# Altium PCB ESP-audio-breakout.PcbDoc
Units mil, origin at the board's own origin, x right, y up, seen from the top; angles counter-clockwise.
Board outline 5095.03 x 2865.02 mil, 2 copper layers (Top Layer, Bottom Layer); 85 components, 80 nets, 390 pads, 684 vias.
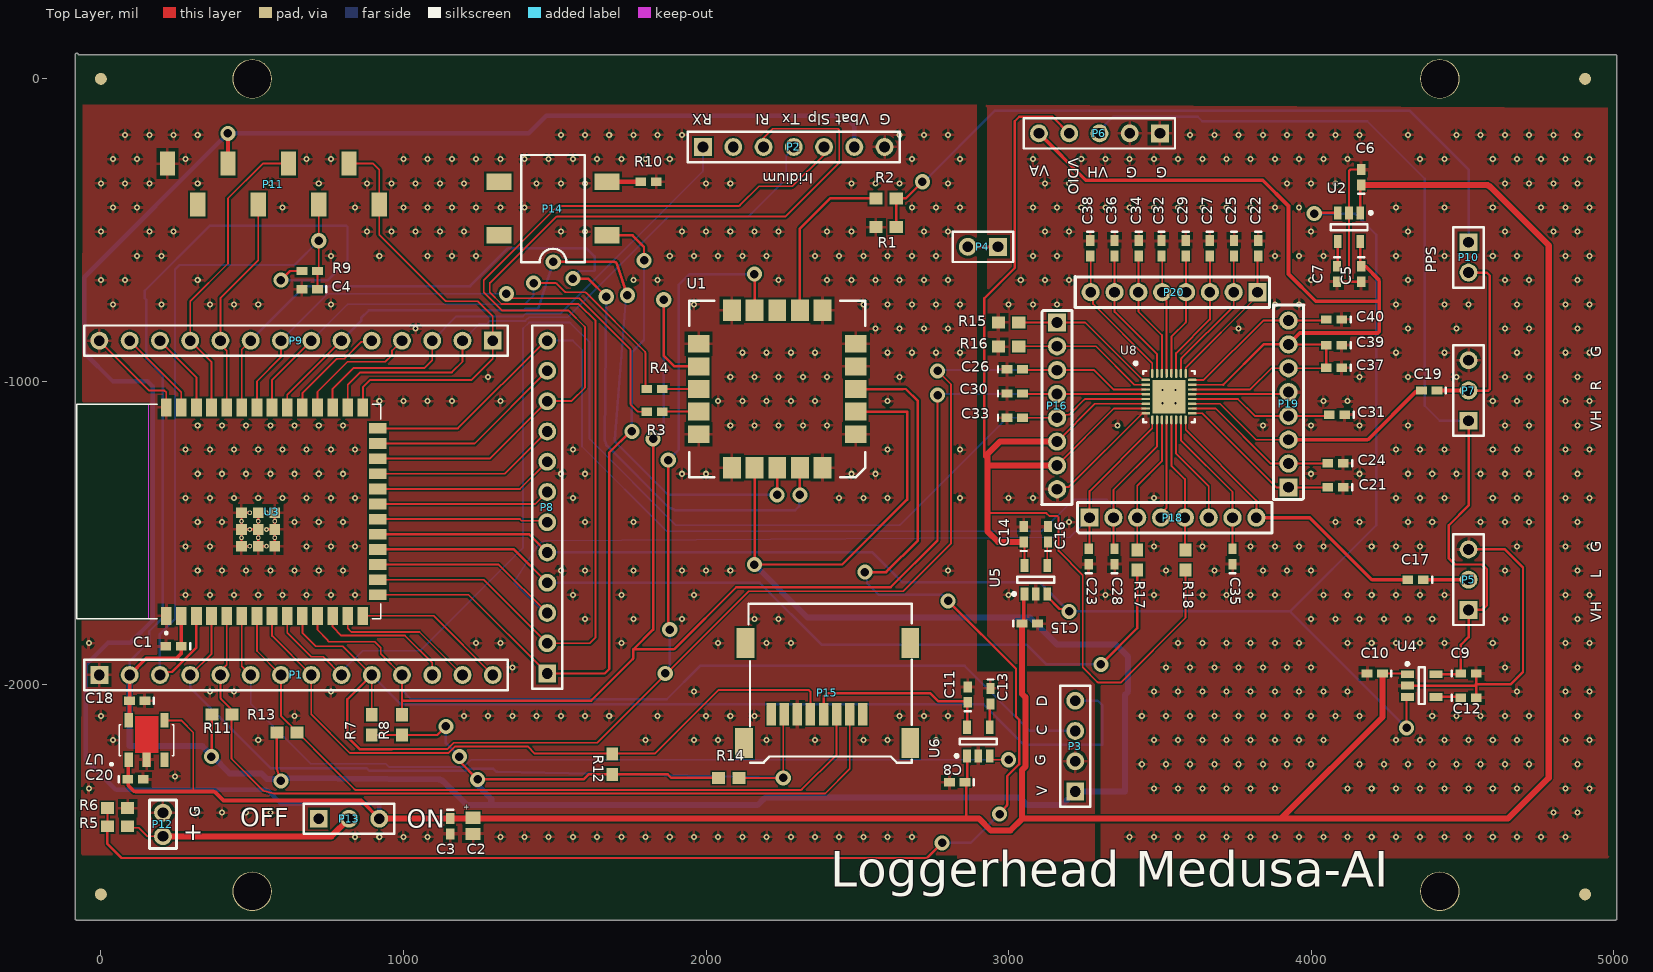
[diagram p0: Top Layer view]
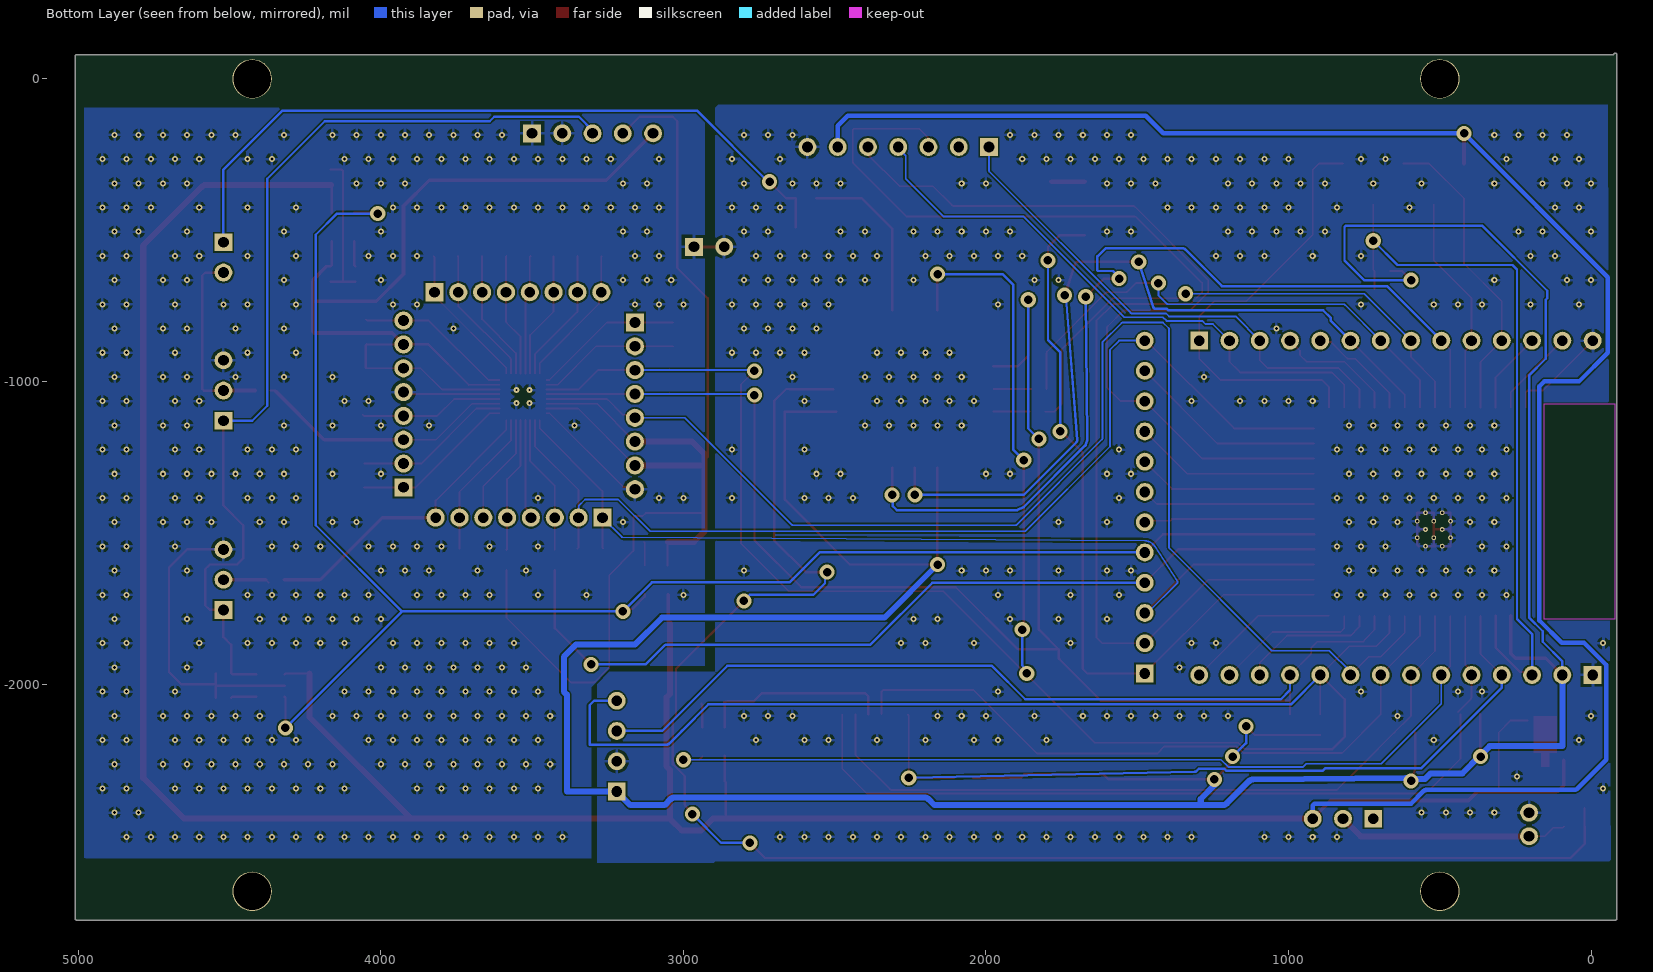
[diagram p1: Bottom Layer view, seen from below]

## Layer stack, top to bottom
Top Solder: solder mask 0.4, Solder Resist, Dk 3.5
Top Layer: signal copper 1.4
Dielectric 1: dielectric 12.6, FR-4, Dk 4.8
Bottom Layer: signal copper 1.4
Bottom Solder: solder mask 0.4, Solder Resist, Dk 3.5

## Board outline
-80,-2780.01 cw(c-80,-2775) -85.01,-2775 -85.01,80 cw(c-80,80) -76.44,83.53 -76.45,83.55 -72.92,80.02 5005,80.02 cw(c5005,75) 5010.02,75 5010.02,-2775 cw(c5005,-2775) 5005,-2780.01

## Design rules (kind name [scope] priority, off if disabled: settings)
Clearance [All] p1: gap=6 ignorepadtopadclearanceinfootprint=FALSE
PolygonConnect [All] p1: connectstyle=Relief reliefconductorwidth=10 reliefentries=4 polygonreliefangle="90 Angle" airgapwidth=10
RoutingVias [All] p1: holewidth=28 width=50 viastyle="Through Hole" minholewidth=28 minwidth=50 maxholewidth=28 maxwidth=50
SolderMaskExpansion [All] p1: expansion=4 istentingtop=FALSE
Width [All] p1: maxlimit=100 minlimit=6 preferedwidth=8
30 further rules are at their usual default settings.

## Classes and differential pairs
component class medusa-ai-audio: C5 C6 C7 C9 C10 C12 C14 C15 C16 C17 C19 C21 C22 C23 C24 C25 C26 C27 C28 C29 C30 C31 C32 C33 C34 C35 C36 C37 C38 C39 C40 P4 P5 P6 P7 P10 P16 P18 P19 P20 R15 R16 R17 R18 U2 U4 U5 U8
component class ESP-audio-breakout: C1 C2 C3 C4 C8 C11 C13 C18 C20 P1 P2 P3 P8 P9 P11 P12 P13 P14 P15 R1 R2 R3 R4 R5 R6 R7 R8 R9 R10 R11 R12 R13 R14 U1 U3 U6 U7

## Components (designator, comment, footprint, x,y, rotation, side; value= is the part's Value field where it differs from the comment)
C1 "0.1uF" 0402 240,-1875 r180 top
C2 "10uF" Tant0805 1230,-2468.5 r90 top
C3 "0.1uF" 0402 1155,-2470 r270 top
C4 "1uF" 0402 690,-695 r180 top value=0.1uF
C5 "2.2uF" 0402 4165,-645 r270 top value=0.1uF
C6 "1uF" 0402 4165,-325 r90 top value=0.1uF
C7 "10nF" 0402 4085,-645 r270 top value=0.1uF
C8 "1.0uF" 0402 2830,-2325 r180 top value=0.1uF
C9 "2.2uF" 0402 4520,-1965 r0 top value=0.1uF
C10 "1uF" 0402 4210,-1965 r180 top value=0.1uF
C11 "2.2uF" 0402 2865,-2035 r90 top value=0.1uF
C12 "10nF" 0402 4520,-2045 r0 top value=0.1uF
C13 "10nF" 0402 2940,-2040 r270 top value=0.1uF
C14 "2.2uF" 0402 3050,-1505 r90 top value=0.1uF
C15 "1uF" 0402 3070,-1800 r0 top value=0.1uF
C16 "10nF" 0402 3130,-1505 r90 top value=0.1uF
C17 "1.0uF" 0402 4345,-1655 r180 top value=0.1uF
C18 "4.7uF" 0402 120,-2055 r180 top value=0.1uF
C19 "1.0uF" 0402 4390,-1030 r180 top value=0.1uF
C20 "4.7uF" 0402 114.41,-2315 r0 top value=0.1uF
C21 "1.0uF" 0402 4080.59,-1350 r180 top value=0.1uF
C22 "1.0uF" 0402 3825,-560 r270 top value=0.1uF
C23 "22pF" 0402 3265,-1578.19 r90 top value=0.1uF
C24 "1.0uF" 0402 4080,-1270 r180 top value=0.1uF
C25 "1.0uF" 0402 3745,-560 r270 top value=0.1uF
C26 "22pF" 0402 3020,-960 r0 top value=0.1uF
C27 "1.0uF" 0402 3665,-560 r270 top value=0.1uF
C28 "22pF" 0402 3350,-1578.19 r90 top value=0.1uF
C29 "1.0uF" 0402 3585,-560 r270 top value=0.1uF
C30 "22pF0.1uF" 0402 3020,-1040 r0 top value=0.1uF
C31 "1.0uF" 0402 4085.59,-1110 r180 top value=0.1uF
C32 "1.0uF" 0402 3505,-560 r270 top value=0.1uF
C33 "22pF" 0402 3020,-1120 r0 top value=0.1uF
C34 "1.0uF" 0402 3430,-560 r270 top value=0.1uF
C35 "1.0uF" 0402 3740,-1578.19 r90 top value=0.1uF
C36 "1.0uF" 0402 3350,-560 r270 top value=0.1uF
C37 "1.0uF" 0402 4075,-955 r180 top value=0.1uF
C38 "1.0uF" 0402 3270,-560 r270 top value=0.1uF
C39 "1.0uF" 0402 4075,-880 r180 top value=0.1uF
C40 "1.0uF" 0402 4075,-795 r180 top value=0.1uF
P1 "Header 14" HDR1X14 -5,-1970 r0 top
P2 "Iridium" HDR1X7 1990,-225 r0 top
P3 "Display" HDR1X4 3220,-2355 r90 top
P4 "GND Tie" HDR1X2 2965,-555 r180 top
P5 "HYDROPHONE L" HDR1X3 4520,-1755 r90 top
P6 "Header 5" HDR1X5 3500,-180 r180 top
P7 "HYDROPHONE R" HDR1X3 4520,-1130 r90 top
P8 "Header 12" HDR1X12 1475,-1965 r90 top
P9 "Header 14" HDR1X14 1295,-865 r180 top
P10 "Jumper PPS to Audio R" HDR1X2 4520,-540 r270 top
P11 "10129380-908001BLF" Header_8_SMT 220,-280 r0 top
P12 "BAT" HDR_2x1_2mm 205,-2503.74 r0 top
P13 "switch" HDR1X3 720,-2445 r0 top
P14 "factory reset" SOP4 1673.27,-517.17 r180 top
P15 "microSD-Molex" microSD_Molex_hinged 2145.2,-2194.49 r90 top
P16 "HDR_8x1_2mm" HDR_8x1_2mm 3160,-805 r180 top
P18 "HDR_8x1_2mm" HDR_8x1_2mm 3267.48,-1450 r270 top
P19 "HDR_8x1_2mm" HDR_8x1_2mm 3925,-1350 r0 top
P20 "HDR_8x1_2mm" HDR_8x1_2mm 3822.52,-705 r90 top
R1 "10k" 3-0603 2595,-490 r0 top
R2 "10k" 3-0603 2595,-395 r180 top
R3 "100Ohm" 2-0402 1830,-1100 r0 top
R4 "100Ohm" 2-0402 1830,-1025 r0 top
R5 "100k" 3-0603 55,-2470 r0 top
R6 "100k" 3-0603 55,-2410 r180 top
R7 "4.7k" 3-0603 895,-2135 r270 top
R8 "4.7k" 3-0603 995,-2135 r270 top
R9 "10k" 2-0402 690,-635 r0 top
R10 "10k" 2-0402 1810,-340 r0 top
R11 "10K" 3-0603 400,-2100 r0 top
R12 "10K" 3-0603 1690,-2265 r90 top
R13 "10K" 3-0603 615,-2160 r0 top
R14 "10K" 3-0603 2075,-2310 r0 top
R15 "10k" 3-0603 3000,-805 r180 top
R16 "10k" 3-0603 3000,-885 r180 top
R17 "51" 3-0603 3425,-1590 r270 top
R18 "10K-DNP" 3-0603 3585,-1590 r270 top
U1 "SAM-M8Q" "GPS SAM-MQ8" 2495.04,-1174.45 r180 top
U2 "ADP1712" MF05A_N 4125,-490 r270 top
U3 "ESP32-S3-WROOM-1-N16R8" XCVR_ESP32-S3-WROOM-1-N16R2 422.87,-1430 r90 top
U4 "ADP1712" MF05A_N 4365,-2005 r0 top
U5 "ADP1712" MF05A_N 3090,-1655 r90 top
U6 "ADP1712" MF05A_N 2900,-2190 r90 top
U7 "3.3V LDO" AP7361C-33Y5-13 91.89,-2250 r90 top
U8 "ES7210" ES7210 3530,-1050 r0 top

## Footprints (in the part's own frame and the unit in brackets; to place one, negate y for a bottom-side part, rotate by r counter-clockwise, add the part's x,y. Pads: shape width x height; smd on the part's side, far side on the other; paste and mask are expansions set on the pad)
2-0402 [mm] "Chip Resistor; Body 1 x 0.5 mm (LxW typ)"
  rect 0.9x0.7 smd: 1(-0.65,0) 2(0.65,0)
3-0603 [mm] "Chip Resistor; Body 1.6 x 0.9 mm (LxW typ)"
  rect 1.1x1 smd: 1(-0.85,0) 2(0.85,0)
0402 [mm] "Chip Capacitor; Body 1.0 x 0.5 mm (LxW typ)"
  rect 0.9x0.7 smd: 1(-0.65,0) 2(0.65,0)
  silkscreen extent -1.4,-0.25 -1.4,0.25
AP7361C-33Y5-13 [mm] "3.3V LDO"
  rect 1.2x0.68 smd: 1(0,0) 3(0,-3) 4(3.3,-3) 5(3.3,0)
  rect 1.2x0.68 smd paste-2 mask+0: 2(0,-1.5)
  Top Layer region: 3.65,-2.465 0.6,-2.465 0.6,-1.84 -0.6,-1.84 -0.6,-1.16 0.6,-1.16 0.6,-0.535 3.65,-0.535
  silkscreen extent -0.48,-3.8 2.95,1.54
ES7210 [mm] "4-ch audio codec"
  oval 0.75x0.2 smd mask+0.05: 1(-1.95,1.4) 2(-1.95,1) 3(-1.95,0.6) 4(-1.95,0.2) 5(-1.95,-0.2) 6(-1.95,-0.6) 7(-1.95,-1) 8(-1.95,-1.4) 17(1.95,-1.4) 18(1.95,-1) 19(1.95,-0.6) 20(1.95,-0.2) 21(1.95,0.2) 22(1.95,0.6) 23(1.95,1) 24(1.95,1.4)
  oval 0.2x0.75 smd mask+0.05: 9(-1.4,-1.95) 10(-1,-1.95) 11(-0.6,-1.95) 12(-0.2,-1.95) 13(0.2,-1.95) 14(0.6,-1.95) 15(1,-1.95) 16(1.4,-1.95) 25(1.4,1.95) 26(1,1.95) 27(0.6,1.95) 28(0.2,1.95) 29(-0.2,1.95) 30(-0.6,1.95) 31(-1,1.95) 32(-1.4,1.95)
  rect 2.8x2.8 smd: 33(0,0)
  silkscreen extent -2.92,-2.15 2.15,2.92, body extent -2,-2 2,2, height 0.75
"GPS SAM-MQ8" [mm]
  rect 1.8x1.5 smd paste-0.25: 1(0,0) 2(0,-1.9) 3(0,-3.8) 4(0,-5.7) 5(0,-7.6) 11(13.2,-7.6) 12(13.2,-5.7) 13(13.2,-3.8) 14(13.2,-1.9) 15(13.2,0)
  rect 1.5x1.8 smd paste-0.25: 6(2.8,-10.4) 7(4.7,-10.4) 8(6.6,-10.4) 9(8.5,-10.4) 10(10.4,-10.4) 16(10.4,2.8) 17(8.5,2.8) 18(6.6,2.8) 19(4.7,2.8) 20(2.8,2.8)
  silkscreen extent -0.8,-11.2 14,3.6
HDR1X2 [mm] "Connector; Header; 2 Position"
  rect 1.5x1.5 hole 0.9: 1(0,0)
  round 1.5 hole 0.9: 2(2.54,0)
  silkscreen extent -1.27,-1.27 3.81,1.27
HDR1X3 [mm] "Connector; Header; 3 Position"
  rect 1.5x1.5 hole 0.9: 1(0,0)
  round 1.5 hole 0.9: 2(2.54,0) 3(5.08,0)
  silkscreen extent -1.27,-1.27 6.35,1.27
HDR1X4 [mm] "Connector; Header; 4 Position"
  rect 1.5x1.5 hole 0.9: 1(0,0)
  round 1.5 hole 0.9: 2(2.54,0) 3(5.08,0) 4(7.62,0)
  silkscreen extent -1.27,-1.27 8.89,1.27
HDR1X5 [mm] "Connector; Header; 5 Position"
  rect 1.5x1.5 hole 0.9: 1(0,0)
  round 1.5 hole 0.9: 2(2.54,0) 3(5.08,0) 4(7.62,0) 5(10.16,0)
  silkscreen extent -1.27,-1.27 11.43,1.27
HDR1X7 [mm] "Connector; Header; 7 Position"
  rect 1.5x1.5 hole 0.9: 1(0,0)
  round 1.5 hole 0.9: 2(2.54,0) 3(5.08,0) 4(7.62,0) 5(10.16,0) 6(12.7,0) 7(15.24,0)
  silkscreen extent -1.27,-1.27 16.51,1.27
HDR1X12 [mm] "Connector; Header; 12 Position"
  rect 1.5x1.5 hole 0.9: 1(0,0)
  round 1.5 hole 0.9: 2(2.54,0) 3(5.08,0) 4(7.62,0) 5(10.16,0) 6(12.7,0) 7(15.24,0) 8(17.78,0) 9(20.32,0) 10(22.86,0) 11(25.4,0) 12(27.94,0)
  silkscreen extent -1.27,-1.27 29.21,1.27
HDR1X14 [mm] "Connector; Header; 14 Position"
  rect 1.5x1.5 hole 0.9: 1(0,0)
  round 1.5 hole 0.9: 2(2.54,0) 3(5.08,0) 4(7.62,0) 5(10.16,0) 6(12.7,0) 7(15.24,0) 8(17.78,0) 9(20.32,0) 10(22.86,0) 11(25.4,0) 12(27.94,0) 13(30.48,0) 14(33.02,0)
  silkscreen extent -1.27,-1.27 34.29,1.27
HDR_2x1_2mm [mm]
  round 1.5 hole 0.9: 1(0,0.016) 2(0,2)
  silkscreen extent -1.14,-1.02 1.14,3.05
HDR_8x1_2mm [mil]
  rect 60x60 hole 35.43: 1(0,0.04)
  round 60 hole 35.43: 2(0,78.78) 3(0,157.52) 4(0,236.26) 5(0,315) 6(0,393.7) 7(0,472.44) 8(0,551.18)
  silkscreen extent -50,-40 51,602
Header_8_SMT [mil] "Amphenol  10129380-908001BLF"
  rect 50x80 smd: 1(0,0) 2(100,-135) 3(200,0) 4(300,-135) 5(400,0) 6(500,-135) 7(600,0) 8(700,-135)
MF05A_N [mm] "SOT23, 5-Leads, Body 2.9x1.6mm, Pitch 0.95mm, Lead Span 2.8mm, IPC Medium Density"
  rect 1.1x0.65 smd: 1(-1.2,0.95) 2(-1.2,0) 3(-1.2,-0.95) 4(1.2,-0.95) 5(1.2,0.95)
  silkscreen extent -1.32,-1.55 0.25,1.95, body extent -0.9,-1.55 0.9,1.55, height 1.19
microSD_Molex_hinged [mm]
  rect 2.5x1.5 smd: 0(0,0.508) 0(8.382,0.381)
  rect 2.5x1.45 smd: 0(0,-13.45) 0(8.382,-13.462)
  rect 1.9x0.8 smd: 1(2.4,-9.475) 2(2.4,-8.375) 3(2.4,-7.275) 4(2.4,-6.175) 5(2.4,-5.075) 6(2.4,-3.975) 7(2.4,-2.875) 8(2.4,-1.775)
  silkscreen extent -1.65,-13.59 11.68,0.13
SOP4 [mm]
  rect 2.1x1.4 smd: 1(0,0) 2(0,-4.5) 3(9.1,-4.5) 4(9.1,0)
  silkscreen extent 1.89,-6.75 7.21,2.25
Tant0805 [mil]
  rect 40x50 smd: 1(-26.5,0) 2(26.5,0)
XCVR_ESP32-S3-WROOM-1-N16R2 [mm]
  rect 1.5x0.9 smd: 1(-8.75,5.26) 2(-8.75,3.99) 3(-8.75,2.72) 4(-8.75,1.45) 5(-8.75,0.18) 6(-8.75,-1.09) 7(-8.75,-2.36) 8(-8.75,-3.63) 9(-8.75,-4.9) 10(-8.75,-6.17) 11(-8.75,-7.44) 12(-8.75,-8.71) 13(-8.75,-9.98) 14(-8.75,-11.25) 27(8.75,-11.25) 28(8.75,-9.98) 29(8.75,-8.71) 30(8.75,-7.44) 31(8.75,-6.17) 32(8.75,-4.9) 33(8.75,-3.63) 34(8.75,-2.36) 35(8.75,-1.09) 36(8.75,0.18) 37(8.75,1.45) 38(8.75,2.72) 39(8.75,3.99) 40(8.75,5.26)
  rect 0.9x1.5 smd: 15(-6.985,-12.5) 16(-5.715,-12.5) 17(-4.445,-12.5) 18(-3.175,-12.5) 19(-1.905,-12.5) 20(-0.635,-12.5) 21(0.635,-12.5) 22(1.905,-12.5) 23(3.175,-12.5) 24(4.445,-12.5) 25(5.715,-12.5) 26(6.985,-12.5)
  rect 0.9x0.9 smd: 41_1(-1.5,-2.46) 41_2(-2.9,-2.46) 41_3(-0.1,-2.46) 41_4(-2.9,-3.86) 41_5(-1.5,-3.86) 41_6(-0.1,-3.86) 41_7(-2.9,-1.06) 41_8(-1.5,-1.06) 41_9(-0.1,-1.06)
  round 0.4 hole 0.2 mask+0: 41_10(-1.5,-1.76) 41_11(-2.9,-1.76) 41_12(-0.1,-1.76) 41_13(-2.9,-3.16) 41_14(-1.5,-3.16) 41_15(-0.1,-3.16) 41_16(-2.2,-1.06) 41_17(-0.8,-1.06) 41_18(-2.2,-2.46) 41_19(-0.8,-2.46) 41_20(-2.2,-3.86) 41_21(-0.8,-3.86)
  Keep-Out Layer region: 9,6.75 -9,6.75 -9,12.75 9,12.75
  Keep-Out Layer region: 9,6.75 -9,6.75 -9,12.75 9,12.75
  silkscreen extent -10.3,-12.75 9,12.75

## Part data
C1 C3 C4 C5 C6 C7 C8 C9 C10 C11 C12 C13 C14 C15 C16 C17 C18 C19 C20 C21 C22 C23 C24 C25 C26 C27 C28 C29 C30 C31 C32 C33 C34 C35 C36 C37 C38 C39 C40: library part C0402, "Ceramic Chip Capacitor - Standard", PackageDocument=Mar-2001, Code_IPC="1005 [0402]", Code_JEITA=0402, ComponentLink1Description="Manufacturer Link", ComponentLink1URL=http://www.kemet.com/, ComponentLink2Description=Datasheet, ComponentLink2URL=http://www.kemet.com/kemet/web/homepage/kechome.nsf/vapubfilesname/F3102TA.pdf/$file/F3102TA.pdf, DatasheetDocument=Mar-2001, LatestRevisionDate=19-Mar-2004, LatestRevisionNote="Silkscreen size reduced.", Note="Footprint corresponds to dimensions for bulk cassette packaging. This case size has tightened tolerances.", PackageReference=0402, Published=17-Jul-2002, Publisher="Altium Limited"
C2: library part Tant0805
P1 P9: "Header, 14-Pin", LatestRevisionDate=17-Jul-2002, LatestRevisionNote="Re-released for DXP Platform.", Publisher="Altium Limited"
P2: library part "Header 7", "Header, 7-Pin", LatestRevisionDate=17-Jul-2002, LatestRevisionNote="Re-released for DXP Platform.", Publisher="Altium Limited"
P3: library part "Header 4", "Header, 4-Pin", LatestRevisionDate=17-Jul-2002, LatestRevisionNote="Re-released for DXP Platform.", Publisher="Altium Limited"
P4 P10: library part "Header 2", "Header, 2-Pin", LatestRevisionDate=17-Jul-2002, LatestRevisionNote="Re-released for DXP Platform.", Publisher="Altium Limited"
P5 P7 P13: library part "Header 3", "Header, 3-Pin", LatestRevisionDate=17-Jul-2002, LatestRevisionNote="Re-released for DXP Platform.", Publisher="Altium Limited"
P6: "Header, 5-Pin", LatestRevisionDate=17-Jul-2002, LatestRevisionNote="Re-released for DXP Platform.", Publisher="Altium Limited"
P8: "Header, 12-Pin", LatestRevisionDate=17-Jul-2002, LatestRevisionNote="Re-released for DXP Platform.", Publisher="Altium Limited"
P11: library part Header8_SMT, "Surface mount header", Supplier Part Number 1=649-1012938090801BLF, Supplier 1=Mouser
P12: library part HDR_2x1_2mm
P14: library part pushbutton, Supplier Part Number 1=450-1757-2-ND, Supplier 1=Digi-Key
P15: library part microSD_Molex_hinged, Supplier Part Number 1=WM19081DKR-ND, Supplier 1=Digi-Key
R1 R2 R5 R6 R7 R8 R15 R16 R17 R18: library part ERJ3RK, "Precision Thick Film Chip Resistor, 10 Ohm to 1M Ohm Range, 1% and 0.5% Tolerance, 0603 Size, 0.063 W", PackageDocument=Mar-2003, Code_IPC="1608 [0603]", ComponentLink1Description="Manufacturer Link", ComponentLink1URL=http://www.panasonic.com/industrial/components/resistive_products.htm, ComponentLink2Description=Datasheet, ComponentLink2URL=http://www.panasonic.com/industrial/components/pdf/AOA0000CE2.pdf, LatestRevisionDate=19-Mar-2004, LatestRevisionNote="Silkscreen size reduced.", PackageReference=3-0603, Published=17-Dec-2003, Publisher="Altium Limited"
R3 R4 R9 R10: library part ERJ2RB, "Precision Thick Film Chip Resistor, 10 Ohm to 1M Ohm Range, 1% and 0.5% Tolerance, 0402 Size, 0.063 W", PackageDocument=Mar-2003, Code_IPC="1005 [0402]", ComponentLink1Description="Manufacturer Link", ComponentLink1URL=http://www.panasonic.com/industrial/components/resistive_products.htm, ComponentLink2Description=Datasheet, ComponentLink2URL=http://www.panasonic.com/industrial/components/pdf/AOA0000CE2.pdf, LatestRevisionDate=19-Mar-2004, LatestRevisionNote="Silkscreen size reduced.", PackageReference=2-0402, Published=17-Dec-2003, Publisher="Altium Limited"
R11 R12 R13 R14: library part ERJ3EK, "Precision Thick Film Chip Resistor, 10 Ohm to 1M Ohm Range, 1% and 0.5% Tolerance, 0603 Size, 0.063 W", PackageDocument=Mar-2003, Code_IPC="1608 [0603]", ComponentLink1Description="Manufacturer Link", ComponentLink1URL=http://www.panasonic.com/industrial/components/resistive_products.htm, ComponentLink2Description=Datasheet, ComponentLink2URL=http://www.panasonic.com/industrial/components/pdf/AOA0000CE2.pdf, LatestRevisionDate=19-Mar-2004, LatestRevisionNote="Silkscreen size reduced.", PackageReference=3-0603, Published=17-Dec-2003, Publisher="Altium Limited"
U1: library part "GPS SAM-M8Q"
U2 U4 U5 U6: library part LP3985IM5-3.3, "Micropower, 150mA Low-Noise Ultra Low-Dropout CMOS Voltage Regulator", DigiKeyPartNumber=LP3985IM5-3.3CT-ND, Manufacturer="National Semiconductor", PackageTopMarking=LDQB*XTT, PowerWise=N, ComponentLink1Description="LP3985 Datasheet", ComponentLink1URL=http://www.national.com/ds/LP/LP3985.pdf, ComponentLink2Description="LP3985 Web Page", ComponentLink2URL=http://www.national.com/pf/LP/LP3985.html, ComponentLink3Description="MF05A Package Page", ComponentLink3URL=http://www.national.com/packaging/folders/mf05a.html, CompType="LDO IC", DatasheetVersion=Aug-2005, PackageDescription="Molded SOT-23, .115 x .063 x .040 in Body, 5 Lead, .0375 in Pitch", PackageReference=MF05A, PackageVersion="revD, Aug-2008", PartNumber=LP3985IM5-3.3, PinCount=5, Published=4-Dec-2008, Publisher="Altium Limited", RoHS=O
U3: library part ESP32-S3-WROOM-1-N16R2, "Bluetooth, WiFi 802.11b/g/n, Bluetooth v5.0 Transceiver Module 2.4GHz PCB Trace Surface Mount", Package=None, Availability="In Stock", Check_prices=https://www.snapeda.com/parts/ESP32-S3-WROOM-1-N16R2/Espressif+Systems/view-part/?ref=eda, MF="Espressif Systems", MP=ESP32-S3-WROOM-1-N16R2, Price=None, Purchase-URL=https://pricing.snapeda.com/search/part/ESP32-S3-WROOM-1-N16R2/?ref=eda, SnapEDA_Link=https://www.snapeda.com/parts/ESP32-S3-WROOM-1-N16R2/Espressif+Systems/view-part/?ref=snap
U7: library part AP7361C-33Y5-13
U8: "Audio CODEC"

## Free pads (board coordinates)
  round 130 hole 125: 0(500,-2685) 0(500,0) 0(4425,-2685) 0(4425,0)
  round 39.37 smd: 10(0,-2695) 10(0,0) 10(4905,-2695) 10(4905,0)

## Via types
v1: diameter 20, hole 10, Top Layer to Bottom Layer, tented both sides, 642 vias
v2: diameter 50, hole 28, Top Layer to Bottom Layer, 38 vias
v3: diameter 19.68, hole 7.87, Top Layer to Bottom Layer, 4 vias

## Nets (pads, with @x,y where several pads share a name; then routed paths per layer and width w, separated by ;. In a path a pad name is that pad's centre, name@x,y a point inside that pad or via, vN(x,y) a via of type N, cw(c..) or ccw(c..) an arc to the next point about the centre after c; other vN are vias at no path point)
3V3: C1.1 C18.2 P1.2 P3.1 R7.2 R8.2 R9.1 R11.1 R12.1 R13.1 R14.1 U1.2 U1.17 U3.2 U7.5 | length 11544.4
  Top Layer w6: U7.5 U7.5@94.41,-2117.56 ; C18.2 C18.2@95,-2054.41 ; C1.1@265,-1875.59 C1.1 C1.1@265.79,-1874.8
  Top Layer w8: R11.1 366.54,-2238.46 v2(365,-2240) v2@370,-2240 ; R13.1 581.54,-2279.3 ccw(c589.54,-2279.3) 581.97,-2281.89 v2(595,-2320) ; v2(595,-665) 625,-635 R9.1 ; R7.2 R8.2 1111.54,-2168.46 v2(1140,-2140) ; v2(1185,-2240) 1185,-2255 v2(1245,-2315) 1595,-2315 1611.54,-2298.46 R12.1 1873.46,-2298.46 1885,-2310 R14.1 ; U1.17 2160.39,-1604.61 v2(2160,-1605) 2450,-1605 2664.65,-1390.35 2664.65,-1099.65 U1.2
  Top Layer w12: U7.5@94.41,-2117.56 C18.2 ; C18.2@95,-2054.41 P1.2 150,-1915 250,-1915 265,-1900 C1.1@265,-1875.59 ; C1.1@265.79,-1874.8 U3.2
  Bottom Layer w8: P1.2 95,-1925 160,-1860 160,-1825.3 205,-1780.3 205,-980 150,-925 150,-730 145,-725 145,-700 360,-485 810.31,-485 815,-489.69 815,-600 750,-665 v2(595,-665) ; v2(1140,-2140) 1140,-2195 v2(1185,-2240)
  Bottom Layer w20: P1.2 95,-2205 335,-2205 367.5,-2237.5 425,-2295 530,-2295 549.26,-2314.26 589.26,-2314.26 v2(595,-2320) 598.57,-2316.49 cw(c612.58,-2330.77) 612.77,-2310.77 1117.34,-2315.44 cw(c1117.15,-2335.44) 1131.27,-2321.28 ; 1131.3,-2321.3 1204.14,-2394.14 ccw(c1218.28,-2380) 1218.28,-2400 1290,-2400 ; v2(1245,-2315) 1243.28,-2316.72 1243.28,-2333.28 1290,-2380 1290,-2400 ; v2(2160,-1605) 2335,-1780 3070,-1780 3160,-1870 3355,-1870 3395,-1910 3395,-2025 3385,-2035 3385,-2355 P3.1 3175,-2400 3062.01,-2400 3042.87,-2380.86 ccw(c3028.72,-2395) 3028.72,-2375 2203.29,-2375 ccw(c2203.29,-2395) 2189.15,-2380.86 2170,-2400 1290,-2400
4V2: P12.1 P13.2 R5.2 | length 769.3
  Top Layer w6: R5.2 93.46,-2475 125,-2475 153.11,-2503.11 P12.1
  Top Layer w20: P12.1 761.89,-2503.11 P13.2
BCLK: C23.2 P8.3 P18.1 U3.17 U8.9 | length 3289.7
  Top Layer w6: U3.17 1315,-1605 P8.3 ; C23.2 3267.52,-1550.08 P18.1 3267.52,-1362.48 3474.88,-1155.12 U8.9
  Bottom Layer w6: P8.3 1468.63,-1765 cw(c1468.67,-1759) 1464.45,-1763.27 1368.25,-1667.07 cw(c1372.52,-1662.86) 1367.49,-1659.59 1442.71,-1543.99 cw(c1475,-1565) 1474.74,-1526.47 3200.07,-1515 ccw(c3200.03,-1509) 3204.28,-1513.24 P18.1
BUTTON: P8.1 P14.1 U3.15 | length 2456.9
  Top Layer w6: U3.15 1215,-1705 P8.1
  Top Layer w8: P8.1 1665,-1965 1680,-1950 1680,-1235 v2@1750,-1165 ; P14.1 1757.17,-517.17 1795,-555 v2(1795,-600)
  Bottom Layer w8: v2(1755,-1165) 1755,-902.5 1795,-862.5 v2(1795,-600)
CHIP_PU: C4.1 P1.3 P11.6 R9.2 U3.3 | length 2420
  Top Layer w6: C4.1 R9.2 720,-630.59 v2(720,-535) P11.6
  Top Layer w8: P1.3 204.77,-1960.23 234.77,-1960.23 315.79,-1879.21 U3.3
  Bottom Layer w8: P1.3 195,-1835 245,-1785 245,-630 260,-615 640,-615 v2(720,-535)
CHRGA: P8.11 U3.25 | length 659.4
  Top Layer w6: U3.25 1235,-1205 P8.11
CS: P1.5 P15.2 R11.2 U3.5 | length 2794.4
  Top Layer w6: U3.5 415.79,-1936.3 395,-1957.09 P1.5 395,-2044 ccw(c401,-2044) 396.74,-2048.22 R11.2@441.01,-2092.49 ; R11.2@431.54,-2100 431.54,-2244.05 ccw(c437.54,-2244.05) 433.29,-2248.29 537.26,-2352.26 ; 537.29,-2352.29 ccw(c541.5,-2348.02) 539.99,-2353.82 571.37,-2361.83 ccw(c572.8,-2356) 572.75,-2362 2393,-2362 2474.92,-2280.08 P15.2
D+: P1.14 U3.14 | length 510.2
  Top Layer w6: U3.14 1099.49,-1774.49 P1.14
D-: P1.13 U3.13 | length 484.4
  Top Layer w6: U3.13 815.79,-1815.79 828,-1828 1053,-1828 P1.13
DGND: C1.2 C2.1 C3.2 C4.2 C8.2 C11.2 C13.1 C18.1 C20.2 P1.1 P2.7 P3.2 P4.2 P9.14 P11.1 P12.2 P15.6 R1.1 R6.1 R10.2 U1.1 U1.4 U1.5 U1.6 U1.10 U1.11 U1.15 U1.16 U1.20 U3.1 U3.40 U3.41_1 U3.41_2 U3.41_3 U3.41_4 U3.41_5 U3.41_6 U3.41_7 U3.41_8 U3.41_9 U3.41_10 U3.41_11 U3.41_12 U3.41_13 U3.41_14 U3.41_15 U3.41_16 U3.41_17 U3.41_18 U3.41_19 U3.41_20 U3.41_21 U6.2 U7.2 | length 901.6
  Top Layer w6: P9.14 160,-1030 210,-1030 215.79,-1035.79 U3.40
  Top Layer w8: U3.41_11 U3.41_7 U3.41_16 U3.41_8 ; U3.41_12 U3.41_9 U3.41_17 U3.41_8 ; U3.41_13 U3.41_2 514.72,-1544.17 519.72,-1539.17 U3.41_18 U3.41_1 ; U3.41_14 U3.41_5 ; U3.41_4@569.84,-1544.17 574.84,-1539.17 U3.41_20 U3.41_5 ; U3.41_8 U3.41_10 U3.41_1 ; U3.41_1 U3.41_19 U3.41_3 U3.41_15 U3.41_6 U3.41_21 U3.41_5
  other v1: 840,-2505 920,-2505 1000,-2505 1080,-2505 1320,-2505 1400,-2505 1480,-2505 1560,-2505 1640,-2505 1720,-2505 1800,-2505 1880,-2505 1960,-2505 2040,-2505 2120,-2505 2200,-2505 2280,-2505 2360,-2505 2440,-2505 2520,-2505 2600,-2505 2680,-2505 320,-2425 400,-2425 480,-2425 560,-2425 -40,-2345 245,-2305 40,-2185 520,-2185 1800,-2185 1960,-2185 2040,-2185 2200,-2185 2360,-2185 2520,-2185 2600,-2185 2760,-2185 0,-2105 640,-2105 1200,-2105 1280,-2105 1360,-2105 1440,-2105 1520,-2105 1600,-2105 1680,-2105 1840,-2105 2000,-2105 2080,-2105 2160,-2105 2640,-2105 2720,-2105 2800,-2105 360,-2025 440,-2025 760,-2025 1960,-2025 1360,-1945 -40,-1865 1240,-1865 1320,-1865 1720,-1865 2040,-1865 2200,-1865 2280,-1865 1600,-1785 1760,-1785 1920,-1785 2160,-1785 2240,-1785 280,-1705 360,-1705 440,-1705 520,-1705 600,-1705 680,-1705 760,-1705 840,-1705 1560,-1705 1720,-1705 1960,-1705 320,-1625 400,-1625 480,-1625 560,-1625 640,-1625 720,-1625 800,-1625 1520,-1625 1600,-1625 1760,-1625 1920,-1625 2000,-1625 2080,-1625 2800,-1625 280,-1545 360,-1545 680,-1545 760,-1545 840,-1545 320,-1465 400,-1465 640,-1465 720,-1465 800,-1465 1600,-1465 1760,-1465 280,-1385 360,-1385 440,-1385 520,-1385 600,-1385 680,-1385 760,-1385 840,-1385 1560,-1385 2440,-1385 2520,-1385 2600,-1385 2840,-1385 320,-1305 400,-1305 480,-1305 560,-1305 640,-1305 720,-1305 800,-1305 1520,-1305 1600,-1305 1920,-1305 2000,-1305 2480,-1305 2560,-1305 280,-1225 360,-1225 440,-1225 520,-1225 600,-1225 680,-1225 760,-1225 840,-1225 1560,-1225 2600,-1225 2840,-1225 320,-1145 400,-1145 480,-1145 560,-1145 640,-1145 720,-1145 800,-1145 2080,-1145 2160,-1145 2240,-1145 2320,-1145 2400,-1145 920,-1065 1000,-1065 1080,-1065 1160,-1065 1320,-1065 2040,-1065 2120,-1065 2200,-1065 2280,-1065 2360,-1065 2600,-1065 1280,-985 2080,-985 2160,-985 2240,-985 2320,-985 2400,-985 2640,-985 2120,-905 2200,-905 2280,-905 2360,-905 2600,-905 2680,-905 2760,-905 2840,-905 1040,-825 2560,-825 2640,-825 2720,-825 2800,-825 40,-745 200,-745 360,-745 440,-745 520,-745 760,-745 1960,-745 2520,-745 2600,-745 2680,-745 2760,-745 2840,-745 0,-665 80,-665 320,-665 1760,-665 1840,-665 2240,-665 2400,-665 2480,-665 2560,-665 2640,-665 2720,-665 2800,-665 120,-585 200,-585 760,-585 920,-585 1080,-585 1160,-585 1240,-585 1880,-585 1960,-585 2040,-585 2120,-585 2200,-585 2360,-585 2440,-585 2520,-585 2600,-585 2680,-585 2760,-585 0,-505 160,-505 240,-505 880,-505 960,-505 1040,-505 1120,-505 1200,-505 1520,-505 1600,-505 1920,-505 2000,-505 2080,-505 2160,-505 2240,-505 2400,-505 2480,-505 2720,-505 2800,-505 40,-425 120,-425 600,-425 840,-425 1000,-425 1080,-425 1160,-425 1240,-425 1320,-425 1400,-425 2680,-425 2760,-425 2840,-425 0,-345 80,-345 160,-345 320,-345 560,-345 720,-345 880,-345 960,-345 1040,-345 1120,-345 1200,-345 1440,-345 1520,-345 1600,-345 2000,-345 2080,-345 2480,-345 2560,-345 2640,-345 2800,-345 40,-265 120,-265 280,-265 680,-265 760,-265 1000,-265 1080,-265 1160,-265 1240,-265 1320,-265 1400,-265 1480,-265 1560,-265 1640,-265 1720,-265 1800,-265 1880,-265 2680,-265 2840,-265 80,-185 160,-185 240,-185 320,-185 1520,-185 1600,-185 1680,-185 1760,-185 1840,-185 1920,-185 2640,-185 2720,-185 2800,-185
ES7210_1: P16.1 R15.1 U8.1 | length 498.4
  Top Layer w6: R15.1 R15.1 P16.1 3252.56,-805.04 3442.4,-994.88 U8.1
ES7210_2: P16.2 R16.1 U8.2 | length 472.8
  Top Layer w6: R16.1 3034.69,-883.78 P16.2 3288.78,-883.78 3415.63,-1010.63 U8.2
ES7210_3: C26.2 P1.10 P3.4 P16.3 R7.1 U1.9 U3.10 U8.3 | length 8852.8
  Top Layer w6: U3.10 665.79,-1830.79 710,-1875 800,-1875 P1.10 R7.1 ; 961.41,-2215 1144.95,-2215 1165.95,-2194 1639.7,-2194 2140.7,-1693 2652,-1693 2810,-1535 2810,-1010 v2(2765,-965) ; C26.2 3048.11,-962.52 P16.3 3282.52,-962.52 3346.38,-1026.38 U8.3
  Top Layer w8: P1.10 815,-2050 814.69,-2050 814.69,-2174.69 855,-2215 961.41,-2215 ; v2@1875,-1820 v2(1875,-1260) ; v2@2160,-650 2160.39,-650.39 U1.9
  Bottom Layer w6: v2@2760,-965 2762.48,-962.52 P16.3
  Bottom Layer w8: P1.10 992.23,-2067.23 2917.54,-2067.23 3004.99,-2154.68 3048,-2197.69 ccw(c3053.63,-2192) 3053.59,-2200 3310,-2200 3310,-2070 3295,-2055 P3.4 ; v2(1865,-1965) 1865,-1953.63 1880,-1938.63 v2(1880,-1820) ; v2(1875,-1260) 1910,-1225 1910,-680 1945,-645 v2(2160,-645)
ES7210_4: C30.2 P1.11 P3.3 P16.4 R8.1 U1.12 U3.11 U8.4 | length 7761.7
  Top Layer w6: U3.11 715.79,-1820.79 750,-1855 750,-1856.49 753.51,-1860 905,-1860 925,-1880 925,-1900 P1.11 995,-2055 R8.1 ; C30.2 3046.85,-1041.26 P16.4 3160.51,-1041.77 3452.87,-1041.77 U8.4
  Top Layer w8: 995,-2055 1620,-2055 1757.66,-1917.34 ccw(c1752,-1911.69) 1760,-1911.69 1760,-1885 ; v2(1825,-1190) 1825,-1820 1760,-1885 ; v2@1860,-727.82 v2(1860,-730) 1860,-911.69 ccw(c1868,-911.69) 1862.34,-917.34 1892.73,-947.73 ccw(c1898.35,-942.04) 1898.31,-950.04 U1.12 ; v2(2765,-1045) 2765,-1525 2610,-1680 2100,-1680 1897.34,-1882.66 cw(c1891.69,-1877) 1891.69,-1885 1760,-1885
  Bottom Layer w6: v2@2760,-1040 2761.26,-1041.26 P16.4
  Bottom Layer w8: P1.11 995,-2020 1025,-2050 1870,-2050 1980,-1940 2855,-1940 3070,-2155 P3.3 ; v2(1825,-1190) 1860,-1155 v2(1860,-730)
ES7210_5: C33.2 P1.9 P16.5 U3.9 U8.5 | length 4614.4
  Top Layer w6: U3.9 615.79,-1830.79 695,-1910 735,-1910 P1.9 ; C33.2 P16.5 3168.24,-1111.76 cw(c3172.49,-1116) 3172.49,-1110 3197.51,-1110 ccw(c3197.51,-1104) 3201.74,-1108.26 3250.39,-1059.61 cw(c3254.61,-1063.87) 3254.61,-1057.87 U8.5
  Bottom Layer w6: P1.9 795,-1960 865,-1890 1055,-1890 1393.24,-1551.76 1394.2,-1550.52 ccw(c1389,-1547.51) 1395,-1547.51 1395,-827.49 cw(c1401,-827.49) 1396.76,-823.24 1415,-805 1547.51,-805 cw(c1547.51,-811) 1551.76,-806.76 1615,-870 1615,-1187.51 ccw(c1621,-1187.51) 1616.74,-1191.74 1898.27,-1473.27 ccw(c1902.49,-1469) 1902.45,-1475 2637.51,-1475 ccw(c2637.51,-1469) 2641.76,-1473.24 2995,-1120 P16.5
ES7210_6: C14.1 P6.4 P16.6 P16.7 R18.2 U5.5 U8.6 U8.7 | length 4411.6
  Top Layer w6: 2930,-1435 3125,-1435 3135,-1445 3161.49,-1445 3165,-1448.51 3165,-1560 3245,-1640 3245,-1942.51 ccw(c3251,-1942.51) 3246.74,-1946.74 3293.27,-1993.27 ccw(c3297.49,-1989) 3297.45,-1995 3370,-1995 3585,-1780 R18.2 ; C14.1 3052.6,-1533.19 U5.5 ; P16.7 3348.07,-1089.37 U8.7 ; P16.6 3285.08,-1073.62 U8.6
  Top Layer w8: 2930,-1275 2932.44,-1277.44 ; 2930,-1259.14 2920,-1249.14 2920,-725 3020,-625 3020,-140 3035,-125 3145,-125 P6.4 ; 2930,-1243.27 cw(c2938,-1243.31) 2932.31,-1237.69
  Top Layer w20: 2930,-1243.27 2930,-1259.14 2930,-1275 2930,-1435 2930,-1495 2965.59,-1530.59 C14.1 ; 2932.31,-1237.69 2971.3,-1198.7 P16.6 ; 2932.44,-1277.44 P16.7
ES7210_8: C5.2 C6.2 C7.2 C9.2 C10.2 C12.2 C14.2 C15.2 C16.2 C21.1 C22.1 C23.1 C24.1 C25.1 C26.1 C27.1 C28.1 C29.1 C30.1 C31.1 C32.1 C33.1 C34.1 C35.1 C36.1 C37.1 C38.1 C39.1 C40.1 P4.1 P5.3 P6.1 P6.2 P7.3 P16.8 P19.5 R15.2 R16.2 U2.2 U4.2 U5.2 U8.8 U8.21 U8.33 | length 2238.1
  Top Layer w6: P16.8 3167.66,-1348.52 3199,-1348.52 3442.4,-1105.12 U8.8 ; U8.21 3607.13,-1041.77 3918.23,-1041.77 P19.5
  Top Layer w8: C7.2 4125,-670.59 ; C5.2 4125,-670.59 ; C6.2 4129.69,-299.41 4125,-304.1 U2.2 4125,-670.59 ; U4.2 4540.31,-2005 4545,-2000.31 ; P5.3 4640,-1555 4700,-1615 4700,-1960 4659.69,-2000.31 4545,-2000.31 ; C12.2 4545.59,-2000.9 4545,-2000.31 ; C9.2 4545,-1965.59 4545,-2000.31
  other v1: 3400,-2505 3480,-2505 3560,-2505 3640,-2505 3720,-2505 3800,-2505 3880,-2505 3960,-2505 4040,-2505 4120,-2505 4200,-2505 4280,-2505 4360,-2505 4440,-2505 4520,-2505 4600,-2505 4680,-2505 4760,-2505 4840,-2505 4800,-2425 4880,-2425 3480,-2345 3560,-2345 3640,-2345 3720,-2345 3800,-2345 3880,-2345 4120,-2345 4200,-2345 4280,-2345 4360,-2345 4440,-2345 4520,-2345 4600,-2345 4680,-2345 4840,-2345 4920,-2345 3440,-2265 3520,-2265 3600,-2265 3680,-2265 3760,-2265 3840,-2265 3920,-2265 4000,-2265 4160,-2265 4240,-2265 4320,-2265 4400,-2265 4480,-2265 4560,-2265 4640,-2265 4720,-2265 4880,-2265 3480,-2185 3560,-2185 3640,-2185 3720,-2185 3800,-2185 3880,-2185 3960,-2185 4040,-2185 4280,-2185 4360,-2185 4440,-2185 4520,-2185 4600,-2185 4680,-2185 4840,-2185 4920,-2185 3440,-2105 3520,-2105 3600,-2105 3680,-2105 3760,-2105 3840,-2105 3920,-2105 4000,-2105 4080,-2105 4160,-2105 4400,-2105 4480,-2105 4560,-2105 4640,-2105 4720,-2105 4880,-2105 3480,-2025 3560,-2025 3640,-2025 3720,-2025 3800,-2025 3880,-2025 3960,-2025 4040,-2025 4120,-2025 4680,-2025 4840,-2025 4920,-2025 3520,-1945 3600,-1945 3680,-1945 3760,-1945 3840,-1945 3920,-1945 4000,-1945 4640,-1945 4880,-1945 3560,-1865 3640,-1865 3720,-1865 3800,-1865 3880,-1865 3960,-1865 4120,-1865 4200,-1865 4280,-1865 4360,-1865 4440,-1865 4600,-1865 4840,-1865 4920,-1865 4000,-1785 4080,-1785 4160,-1785 4240,-1785 4320,-1785 4400,-1785 4640,-1785 4880,-1785 3000,-1705 3320,-1705 3480,-1705 3640,-1705 3720,-1705 3800,-1705 3880,-1705 4040,-1705 4120,-1705 4200,-1705 4280,-1705 4360,-1705 4440,-1705 4840,-1705 4920,-1705 3520,-1625 3680,-1625 3840,-1625 3920,-1625 4000,-1625 4640,-1625 4880,-1625 3480,-1545 3640,-1545 3800,-1545 3880,-1545 3960,-1545 4040,-1545 4200,-1545 4280,-1545 4360,-1545 4680,-1545 4840,-1545 4920,-1545 3200,-1465 4080,-1465 4160,-1465 4320,-1465 4400,-1465 4560,-1465 4640,-1465 4720,-1465 4880,-1465 3000,-1385 3080,-1385 3480,-1385 4280,-1385 4360,-1385 4440,-1385 4600,-1385 4680,-1385 4840,-1385 4920,-1385 4000,-1305 4160,-1305 4320,-1305 4400,-1305 4480,-1305 4560,-1305 4640,-1305 4720,-1305 4880,-1305 4280,-1225 4360,-1225 4440,-1225 4600,-1225 4680,-1225 4840,-1225 4920,-1225 3360,-1145 3840,-1145 4000,-1145 4160,-1145 4320,-1145 4640,-1145 4720,-1145 4880,-1145 4040,-1065 4120,-1065 4600,-1065 4680,-1065 4840,-1065 4920,-1065 4160,-985 4320,-985 4480,-985 4640,-985 4720,-985 4880,-985 4280,-905 4440,-905 4680,-905 4840,-905 4920,-905 3760,-825 4320,-825 4480,-825 4640,-825 4720,-825 4880,-825 3000,-745 3080,-745 3160,-745 3880,-745 3960,-745 4280,-745 4440,-745 4520,-745 4680,-745 4840,-745 4920,-745 3040,-665 3120,-665 3200,-665 4000,-665 4320,-665 4640,-665 4720,-665 4880,-665 3080,-585 3160,-585 3880,-585 3960,-585 4040,-585 4280,-585 4440,-585 4600,-585 4680,-585 4840,-585 4920,-585 3120,-505 3200,-505 4000,-505 4320,-505 4640,-505 4800,-505 4880,-505 3080,-425 3160,-425 3240,-425 3320,-425 3400,-425 3480,-425 3560,-425 3640,-425 3720,-425 3800,-425 3880,-425 3960,-425 4280,-425 4440,-425 4600,-425 4760,-425 4840,-425 4920,-425 3120,-345 3200,-345 3920,-345 4000,-345 4080,-345 4640,-345 4720,-345 4800,-345 4880,-345 3080,-265 3240,-265 3320,-265 3400,-265 3480,-265 3560,-265 3640,-265 3720,-265 3800,-265 3880,-265 3960,-265 4040,-265 4120,-265 4360,-265 4440,-265 4600,-265 4680,-265 4760,-265 4840,-265 4920,-265 3600,-185 3680,-185 3760,-185 3840,-185 3920,-185 4000,-185 4080,-185 4160,-185 4320,-185 4480,-185 4560,-185 4640,-185 4720,-185 4800,-185 4880,-185
  other v3: 3508.35,-1071.65 3551.65,-1071.65 3508.35,-1028.35 3551.65,-1028.35
ES7210_10: C28.2 P8.12 P18.2 U3.26 U8.10 | length 3577.5
  Top Layer w6: U3.26 1180,-1155 1470,-865 P8.12 ; C28.2 3346.26,-1548.86 P18.2 3346.26,-1358.74 3490.63,-1214.37 U8.10
  Bottom Layer w6: P8.12 1560,-865 1590,-895 1590,-1215 1868.24,-1493.24 ccw(c1872.49,-1489) 1872.49,-1495 3107.51,-1495 ccw(c3107.51,-1489) 3111.76,-1493.24 3215,-1390 3325,-1390 3346,-1411 3346,-1449.74 P18.2
ES7210_11: P18.3 R17.1 U8.11 | length 463.5
  Top Layer w6: R17.1 P18.3 3425,-1345 3506.38,-1263.62 U8.11
ES7210_12: P18.4 U8.12 | length 330.8
  Top Layer w6: P18.4 3503.74,-1435.39 3522.13,-1417 U8.12
ES7210_13: P18.5 R18.1 U8.13 | length 449.3
  Top Layer w6: U8.13 3537.87,-1277.87 3582.48,-1322.48 P18.5 3582.48,-1554.02 R18.1
ES7210_14: P18.6 U8.14 | length 367.8
  Top Layer w6: U8.14 3553.62,-1238.62 3661.18,-1346.18 P18.6
ES7210_15: C35.2 P18.7 U8.15 | length 496.5
  Top Layer w6: U8.15 3569.37,-1194.37 3739.92,-1364.92 P18.7 3739.92,-1552.52 C35.2
ES7210_16: C17.2 P18.8 U8.16 | length 1005.4
  Top Layer w6: U8.16 3585.12,-1160.12 3818.66,-1393.66 P18.8 ; 4198.26,-1653.26 ccw(c4202.49,-1649) 4202.49,-1655
  Top Layer w12: P18.8 3995,-1450 4198.24,-1653.24 ; 4202.49,-1655 C17.2
ES7210_17: C21.2 P19.1 U8.17 | length 549.7
  Top Layer w6: U8.17 3640.12,-1105.12 3884.96,-1349.96 P19.1 C21.2 C21.2
ES7210_18: C24.2 P19.2 U8.18 | length 523.5
  Top Layer w6: U8.18 3684.37,-1089.37 3866.22,-1271.22 P19.2 4053.19,-1271.22 C24.2
ES7210_19: C19.2 P19.3 U8.19 | length 873.7
  Top Layer w6: U8.19 3698.62,-1073.62 3817.48,-1192.48 P19.3 ; 4185.03,-1192.48 ccw(c4185.03,-1186.48) 4189.26,-1190.74 ; C19.2@4348.26,-1031.74 cw(c4352.49,-1036) 4352.49,-1030 C19.2
  Top Layer w12: P19.3 4185.03,-1192.48 ; 4189.26,-1190.74 C19.2@4348.26,-1031.74
ES7210_20: C31.2 P19.4 U8.20 | length 477.9
  Top Layer w6: U8.20 3757.87,-1057.87 3813.74,-1113.74 P19.4 4056.26,-1113.74 C31.2
ES7210_22: C5.1 C37.2 C39.2 P6.5 P19.6 P19.7 U2.5 U8.22 U8.23 | length 3181.9
  Top Layer w6: U8.22 3798.62,-1026.38 3868.7,-956.3 P19.6 4048.11,-956.3 C37.2 ; U8.23 3709.37,-1010.63 ; P19.7 C39.2@4046.97,-877.56
  Top Layer w8: 3709.37,-1010.63 3842.44,-877.56 P19.7 ; C39.2@4046.97,-877.56 C39.2 C37.2 ; U2.5 4162.4,-616.81 C5.1 4176.1,-619.41 cw(c4176.1,-627.41) 4181.75,-621.75 ; 4220.31,-840 4225,-835.31 ; 4222.67,-662.67 cw(c4217,-668.31) 4225,-668.27
  Top Layer w12: P6.5 3255,-335 3840,-335 3925,-420 3925,-645 4015,-735 4225,-735 ; P19.7 3962.56,-840 4220.31,-840 ; 4181.75,-621.75 4222.67,-662.67 ; 4225,-835.31 4225,-735 ; 4225,-668.31 4225,-735
ES7210_24: C40.2 P19.8 U8.24 | length 525.4
  Top Layer w6: U8.24 3645.12,-994.88 3841.18,-798.82 P19.8 4045.59,-798.82 C40.2
ES7210_25: C22.2 P20.1 U8.25 | length 486.5
  Top Layer w6: U8.25 3585.12,-957.33 cw(c3591.12,-957.37) 3586.84,-953.16 3820.75,-719.25 ccw(c3816.48,-715.03) 3822.48,-715.03 P20.1 3822.48,-588.11 C22.2
ES7210_26: C25.2 P20.2 U8.26 | length 459.9
  Top Layer w6: U8.26 3569.37,-928.08 cw(c3575.37,-928.12) 3571.1,-923.9 3742.01,-752.99 ccw(c3737.74,-748.77) 3743.74,-748.77 P20.2 3743.74,-586.85 C25.2
ES7210_27: C27.2 P20.3 U8.27 | length 433.8
  Top Layer w6: U8.27 3553.62,-906.38 3665,-795 P20.3 C27.2
ES7210_28: C29.2 P20.4 U8.28 | length 407.7
  Top Layer w6: U8.28 3537.87,-854.58 cw(c3543.87,-854.61) 3539.6,-850.4 3584.53,-805.47 ccw(c3580.26,-801.25) 3586.26,-801.25 P20.4 3586.26,-586.85 C29.2
ES7210_29: C32.2 P20.5 U8.29 | length 394.7
  Top Layer w6: C32.2 3507.52,-588.11 P20.5 3507.52,-719.61 3522.13,-734.22 U8.29
ES7210_30: C34.2 P20.6 U8.30 | length 420.3
  Top Layer w6: C34.2 3428.82,-586.77 P20.6 3428.82,-768.82 3506.38,-846.38 U8.30
ES7210_31: C36.2 P20.7 U8.31 | length 445.9
  Top Layer w6: C36.2 3350.08,-585.67 P20.7 3350.08,-770.08 3490.63,-910.63 U8.31
ES7210_32: C38.2 P20.8 U8.32 | length 472.5
  Top Layer w6: C38.2 3271.34,-586.93 P20.8 3279,-712.66 3279,-744 3474.88,-939.88 U8.32
GPIO0: P9.1 P11.7 P11.8 U3.27 | length 1484.4
  Top Layer w6: P11.7 900,-280 920,-300 P11.8 920,-515 1138.24,-733.24 ccw(c1142.49,-729) 1142.49,-735 1245,-735 1295,-785 P9.1 1295,-925 1225,-995 890,-995 865.79,-1019.21 U3.27
GPS_PIN: P9.9 U1.19 U3.35 | length 3134.7
  Top Layer w6: U3.35 465.79,-894.21 P9.9
  Top Layer w8: v2(1560,-660) 1610,-660 v2(1670,-720) ; v2@2310,-1385 v2(2310,-1375) U1.19
  Bottom Layer w8: P9.9 675,-685 1220,-685 1342.67,-562.33 cw(c1348.31,-568) 1348.27,-560 ; 1348.31,-560 1605,-560 1631.69,-586.69 1631.69,-633.31 1630,-635 1580,-635 v2@1555,-660 ; v2(1670,-720) 1665.04,-1191.62 ccw(c1673.04,-1191.67) 1665.42,-1194.11 1670.18,-1208.93 ccw(c1677.79,-1206.48) 1672.11,-1212.11 1874.13,-1414.13 ccw(c1879.76,-1408.44) 1876.37,-1415.69 ; 1876.41,-1415.71 1894.96,-1424.26 ccw(c1898.31,-1417) 1898.31,-1425 2295,-1425 2308,-1412 2308,-1377 v2(2310,-1375)
GPS_RST: P9.6 U1.18 U3.32 | length 2663.5
  Top Layer w6: U3.32 615.79,-1044.21 P9.6
  Top Layer w8: v2(1495,-605) 1697,-605 cw(c1697,-613) 1704.58,-610.43 v2(1740,-715) ; v2@2235.2,-1375 U1.18
  Bottom Layer w8: P9.6 860,-800 860,-790 885,-765 1396.62,-765 1401.62,-760 1439.17,-760 ccw(c1439.17,-752) 1446.79,-754.46 v2(1495,-605) ; v2(1740,-715) 1738.08,-716.64 ccw(c1743.28,-722.72) 1735.31,-722.07 1698.68,-1194.75 ccw(c1706.66,-1195.35) 1701,-1201 1872.69,-1372.69 ccw(c1878.31,-1367) 1878.26,-1375 v2(2235,-1375)
HYDRO_EN: P8.5 U2.3 U3.19 U4.3 U5.3 | length 5546.1
  Top Layer w8: U3.19 1415,-1505 P8.5 ; U5.3 3127.4,-1711.1 3168.26,-1751.96 3191.96,-1751.96 v2(3200,-1760) ; v2(4010,-445) 4012.24,-442.76 U2.3 ; v2(4315,-2145) 4315,-2045.16 U4.3
  Bottom Layer w8: P8.5 2550,-1565 2649,-1664 3104,-1664 v2(3200,-1760) 3930,-1760 ; v2(4010,-445) 4145,-445 4215,-515 4215,-1475 3930,-1760 ; v2(4315,-2145) 3930,-1760
I2SDIN: P1.12 U3.12 | length 454.9
  Top Layer w6: U3.12 765.79,-1810.79 795,-1840 1005,-1840 1095,-1930 P1.12
I2SDOUT: P8.4 R17.2 U3.18 | length 2908
  Top Layer w8: U3.18 1365,-1555 P8.4 ; v2(3305,-1935) 3425,-1815 R17.2
  Bottom Layer w8: P8.4 2176.79,-1665 2379.45,-1867.66 ccw(c2385.11,-1862) 2385.11,-1870 3056.69,-1870 cw(c3056.69,-1878) 3062.34,-1872.34 3125,-1935 v2(3305,-1935)
IN_R: C19.1 P7.2 P10.2 | length 625.8
  Top Layer w8: P7.2 4585.31,-1030 4590,-1025.31 4590,-650 4580,-640 P10.2
  Top Layer w12: C19.1 P7.2
IO1: P9.13 U3.39 | length 291.3
  Top Layer w6: P9.13 265.79,-1035.79 U3.39
IO2: P9.12 U3.38 | length 270.5
  Top Layer w6: P9.12 315.79,-985.79 U3.38
IO14: P8.8 U3.22 | length 597.3
  Top Layer w6: U3.22 1385,-1355 P8.8
IO23: P8.9 U3.23 | length 618
  Top Layer w6: U3.23 1335,-1305 P8.9
IR_SLEEP: P2.5 P8.10 U3.24 | length 2724.8
  Top Layer w6: U3.24 1285,-1255 P8.10 1552.51,-1065 ccw(c1552.51,-1059) 1556.74,-1063.26 1598.27,-1021.73 ccw(c1594,-1017.51) 1600,-1017.51 1600,-822.49 ccw(c1594,-822.49) 1598.26,-818.26 1546.73,-766.73 ccw(c1542.51,-771) 1542.51,-765 1325,-765 1265,-705 1265,-665 1508.24,-421.76 cw(c1512.49,-426) 1512.49,-420 2107.51,-420 ccw(c2107.51,-414) 2111.76,-418.24 2175,-355 2282.51,-355 ccw(c2282.51,-349) 2286.74,-353.26 2388.27,-251.73 ccw(c2384,-247.51) 2390,-247.51 P2.5
MISO: P1.4 P15.7 R14.2 U3.4 | length 2708.5
  Top Layer w6: P1.4 365.79,-1899.21 U3.4 ; R14.2@2105,-2310 v2(2255,-2310) 2255,-2105.87 cw(c2261,-2105.87) 2256.76,-2101.63 P15.7
  Bottom Layer w8: P1.4 295,-2011.74 560.91,-2277.66 878.02,-2277.66 887.36,-2287 1204.47,-2287 1211.47,-2280 1296.52,-2280 1303.88,-2287.36 ; 1303.91,-2287.39 ccw(c1309.54,-2281.71) 1309.37,-2289.71 v2(2255,-2310)
MOSI: P1.7 P15.3 R13.2 U3.7 | length 2482.6
  Top Layer w6: U3.7 515.79,-1890.79 P1.7 595,-2105 650,-2160 754.98,-2264.98 838.24,-2348.24 ccw(c842.49,-2344) 842.49,-2350 2312.51,-2350 ccw(c2312.51,-2344) 2316.76,-2348.24 2431.61,-2233.39 P15.3
NetAv: P2.2
NetC7_1: C7.1 U2.4 | length 82.9
  Top Layer w8: C7.1 4085.26,-619.15 ccw(c4079.6,-613.5) 4087.6,-613.5 4087.6,-554.9 U2.4
NetC12_1: C12.1 U4.4 | length 83.2
  Top Layer w8: U4.4 4491.81,-2042.4 C12.1
NetC13_2: C13.2 U6.4 | length 78.2
  Top Layer w8: U6.4 2937.4,-2068.19 C13.2
NetC16_1: C16.1 U5.4 | length 78.2
  Top Layer w6: U5.4 3127.4,-1533.19 C16.1
NetC17_1: C17.1 P5.2 | length 163.6
  Top Layer w6: C17.1@4370.59,-1665 C17.1@4380.59,-1655
  Top Layer w12: C17.1@4380.59,-1655 P5.2@4530,-1655
NetP14_2: P14.2 R10.1 | length 111.1
  Top Layer w15: P14.2 R10.1
NetR2_2: R2.2 U1.7 | length 563
  Top Layer w8: U1.7 2310,-495 2410,-395 R2.2
NetR3_2: R3.2 U1.14 | length 119.9
  Top Layer w6: R3.2 1855.95,-1099.65 U1.14
NetR4_2: R4.2 U1.13 | length 124.8
  Top Layer w6: R4.2@1850.59,-1025 1850.75,-1024.84 U1.13
PPS: P10.1 R1.2 R2.1 | length 2427.4
  Top Layer w8: R1.2 R2.1 2660,-395 v2(2715,-340)
  Bottom Layer w8: v2(2715,-340) 2720,-340 2955,-105 4325,-105 4520,-300 P10.1
RI: P2.3 P8.2 U3.16 | length 3970
  Top Layer w6: U3.16 1265,-1655 P8.2 1615,-1865 1635,-1845 1635,-800 1580.76,-745.76 ccw(c1576.51,-750) 1576.51,-744 1324,-744 1285,-705 1285,-677.45 cw(c1291,-677.49) 1286.73,-673.27 1503.24,-456.76 cw(c1507.49,-461) 1507.49,-455 2259.49,-455 ccw(c2259.49,-449) 2263.73,-453.24 2438.24,-278.73 ccw(c2434,-274.49) 2440,-274.49 2440,-170.97 ccw(c2434,-171) 2434,-165 2220,-165 2190,-195
RX_GPS: P9.7 R4.1 U3.33 | length 1705.6
  Top Layer w6: U3.33 565.79,-994.21 P9.7 P9.7@695,-855 ; v2(1430,-675) 1502.51,-675 cw(c1502.51,-681) 1506.73,-676.73 1533.25,-703.25 ccw(c1537.49,-699) 1537.49,-705 1599.13,-705 cw(c1599.13,-711) 1603.37,-706.76 1797.65,-901.04 cw(c1793.41,-905.28) 1799.41,-905.28 R4.1@1799.41,-1025
  Bottom Layer w6: P9.7 813.24,-746.76 cw(c817.49,-751) 817.49,-745 1397.51,-745 ccw(c1397.51,-739) 1401.76,-743.24 1430,-715 v2(1430,-675)
RX_IRIDIUM: P2.1 P9.3 U3.29 | length 1701
  Top Layer w6: U3.29 765.79,-1024.21 835,-955 1070,-955 1095,-930 P9.3
  Bottom Layer w6: P9.3 1175,-785 1395,-785 1405,-775 1517.51,-775 ccw(c1517.51,-769) 1521.74,-773.26 1988.27,-306.73 ccw(c1984,-302.51) 1990,-302.51 P2.1
RX_SWARM: P9.5 U3.31 | length 346.9
  Top Layer w6: U3.31 665.79,-1039.21 778.26,-926.74 cw(c782.49,-931) 782.49,-925 802.51,-925 ccw(c802.51,-919) 806.74,-923.26 859.41,-870.59 cw(c863.64,-874.85) 863.64,-868.85 891.15,-868.85 P9.5
RXD0: P9.10 P11.4 U3.36 | length 730.9
  Top Layer w6: U3.36 415.79,-898.7 395,-877.91 P9.10 395,-725 520,-600 P11.4
SCK: P1.8 P15.5 R12.2 U3.8 | length 2265.4
  Top Layer w6: U3.8 565.79,-1840.79 P1.8 695,-2100 823.24,-2228.24 1148.67,-2228.24 1170.92,-2206 1410.12,-2206 1434.12,-2230 1830,-2230 2040,-2020 2340,-2020 2345,-2025 P15.5
SD_EN: P1.6 U3.6 U6.3 | length 2973.7
  Top Layer w6: U3.6 465.79,-1940.79 P1.6 ; U6.3 2937.4,-2240.2 2947.2,-2250 v2(3000,-2250)
  Bottom Layer w6: P1.6 495,-2065 693.24,-2263.24 940.78,-2263.24 951.54,-2274 1199.08,-2274 1223.08,-2250 v2(3000,-2250)
TILE_EN: P8.6 U3.20 | length 564.1
  Top Layer w6: U3.20 1385,-1455 1390,-1460 1470,-1460 P8.6
TX_GPS: P9.8 R3.1 U3.34 | length 1793.6
  Top Layer w6: U3.34 515.79,-999.21 595,-920 P9.8 ; v2(1340,-710) 1353.24,-723.24 ccw(c1357.49,-719) 1357.49,-725 1579,-725 cw(c1579,-731) 1583.24,-726.76 1748.24,-891.76 cw(c1744,-896) 1750,-896 1750,-1072.76 ccw(c1756,-1072.76) 1751.74,-1076.99 1773.01,-1098.26 ccw(c1777.24,-1094) 1777.24,-1100 R3.1
  Bottom Layer w6: P9.8 750,-710 v2(1340,-710)
TX_IRIDIUM: P2.4 P9.2 U3.28 | length 1962.3
  Top Layer w6: U3.28 815.79,-1010.79 856.57,-970 1160,-970 1195,-935 P9.2
  Bottom Layer w6: P9.2 1250,-810 1275,-810 1285,-800 1403.03,-800 1415.53,-787.5 1542.5,-787.5 1875,-455 2140,-455 2265,-330 2265,-254.49 2290,-229.49 P2.4
TX_SWARM: P9.4 U3.30 | length 409.4
  Top Layer w6: U3.30 715.79,-1034.21 815,-935 940,-935 962.42,-912.58 962.42,-897.58 P9.4
TXD0: P9.11 P11.5 U3.37 | length 1019.2
  Top Layer w6: U3.37 365.79,-935.79 P9.11 295,-735 420,-610 420,-395 535,-280 P11.5
V_BCKP: R5.1 R6.2 U1.3 | length 5196.4
  Top Layer w6: R5.1 R6.2 ; 2649.84,-1024.84 2650,-1025
  Top Layer w8: R5.1 21.54,-2528.46 68.07,-2575 2730,-2575 v2(2780,-2525) ; U1.3@2505,-1025 2650,-1025 ; v2(2525,-1630) 2595,-1630 2700,-1525 2700,-1065 2659.84,-1024.84 2649.84,-1024.84 ; v2(2800,-1725) 3024.41,-1949.41 3024.41,-2107.34 3035,-2117.93 3035,-2264.5 2995,-2304.5 2995,-2397.02 cw(c2987,-2397.02) 2993.15,-2402.13 v2(2970,-2430)
  Bottom Layer w8: v2(2525,-1630) 2532,-1637 2532,-1667 2570,-1705 2780,-1705 v2(2800,-1725) ; v2(2780,-2525) 2875,-2525 v2(2970,-2430)
VCC_SD: C11.1 P15.4 U6.5 | length 634.5
  Top Layer w8: P15.4 2388.31,-2041.69 2400,-2030 2740,-2030 2764.31,-2054.31 ccw(c2769.97,-2048.65) 2769.97,-2056.65 2855.22,-2056.65 C11.1 2862.6,-2062.99 U6.5
VH: C9.1 P5.1 P6.3 P7.1 U4.5 | length 3215.7
  Top Layer w8: U4.5 4491.81,-1967.6 C9.1 4494.41,-1870.59 4520,-1845 P5.1 4565,-1755 4580,-1740 4580,-1620 4565,-1605 4475,-1605 4455,-1585 4455,-1475 4520,-1410 P7.1
  Bottom Layer w8: P6.3 3300,-170 3345,-125 3625,-125 3640,-140 4185,-140 4375,-330 4375,-1080 4425,-1130 P7.1
VIN: C2.2 C3.1 C6.1 C8.1 C10.1 C15.1 C20.1 P2.6 P11.3 P13.3 U2.1 U4.1 U5.1 U6.1 U7.1 U7.4 | length 15351.5
  Top Layer w6: U7.1@90,-2251.89 U7.1 ; U7.4 264.92,-2120.08 305,-2160.16 305,-2355 ; U5.1@3050,-1704.84 U5.1
  Top Layer w8: 2855,-2445 2859.41,-2440.59 2859.41,-2325 2862.6,-2321.81 U6.1 ; U2.1 4162.4,-353.19 C6.1 ; C10.1 4315.16,-1965 U4.1
  Top Layer w12: U7.1@90,-2251.89 90,-2335 106.49,-2351.49 ccw(c114.97,-2343) 114.97,-2355 305,-2355 370.03,-2355 cw(c370.03,-2367) 378.51,-2358.51 405,-2385 860,-2385 P13.3 ; P11.3 v2(420,-180) ; C15.1@3050,-1794.41 U5.1@3050,-1704.84
  Top Layer w20: P13.3 1155,-2445 1230,-2445 2855,-2445 2902.35,-2445 2941.42,-2484.07 3005.34,-2484.07 3044.41,-2445 ; C15.1 3044.41,-2032.99 3055,-2043.58 3055,-2272.78 3044.41,-2283.37 3044.41,-2445 ; C6.1 4577.31,-350.59 cw(c4577.31,-370.59) 4591.45,-356.45 4785,-550 4785,-2310 4650,-2445 3900,-2445 ; C10.1 4235.59,-2109.41 3900,-2445 ; 3044.41,-2445 3900,-2445
  Bottom Layer w12: 915,-2395 920,-2400
  Bottom Layer w15: 915,-2395 595,-2395 554.39,-2354.39 ccw(c543.79,-2365) 543.79,-2350 56.21,-2350 cw(c56.21,-2335) 45.65,-2345.65 45.61,-2345.61 -50,-2250 -50,-1936.85 23.47,-1863.39 97.16,-1863.39 170.63,-1789.92 170.63,-1015.63 155,-1000 40,-1000 -55,-905 -55,-655 v2(420,-180) 1413.45,-180 1472.24,-121.21 2456.21,-121.21 2490,-155 P2.6 ; P13.3 920,-2400
VSENS: P8.7 U3.21 | length 576.6
  Top Layer w6: U3.21 1435,-1405 P8.7
pads on no net: P11.2 P13.1 P14.3 P14.4 P15.0 P15.1 P15.8 U1.8 U7.3
copper on no net: | length 95
  Top Layer w10: 2865,-555 2960,-555

## Polygon pours and split planes (outlines as drawn)
ES7210_8 on Bottom Layer "ES7210_8_L02_P007" (solid, pour order 7): 2930,-85 2940,-95 4980,-95 4980,-2580 4975,-2575 3305,-2575 3305,-2010 3240,-1945 3240,-1940 2930,-1940
DGND on Bottom Layer "DGND_L02_P006" (solid, pour order 6): 2875,-1939.05 2895.95,-1960 3245,-1960 3285,-2000 3285,-2590 2900,-2590 2875,-2565
DGND on Bottom Layer "DGND_L02_P003" (solid, pour order 3): -55,-85 2885,-85 2895,-95 2895,-2585 -60,-2585 -65,-2580
ES7210_8 on Top Layer "ES7210_8_L01_P004" (solid, pour order 4): 2920,-85 2930,-95 2930,-1940 3235,-1940 3305,-2010 3305,-2575 4980,-2575 4985,-2570 4980,-2565 4980,-95
DGND on Top Layer "DGND_L01_P002" (solid, pour order 2): -60,-85 2895,-85 2895,-2580 2880,-2565 -65,-2565
DGND on Top Layer "DGND_L01_P005" (solid, pour order 5): 2835,-1960 3245,-1960 3285,-2000 3285,-2585 2840,-2585 2830,-2575

## Silkscreen, mask and mechanical layers (free items; w line width, h text height)
Top Overlay:
  text "RX" at 2020,-105 h60 r180
  text "RI" at 2210,-105 h60 r180
  text "Tx" at 2310,-105 h60 r180
  text "Slp" at 2410,-105.66 h60 r180
  text "Vbat" at 2539.94,-105.61 h60 r180
  text "G" at 2610,-105.67 h60 r180
  text "VDIO" at 3185.67,-260.06 h60 r270
  text "VA" at 3134.94,-275 h60 r180
  text "VH" at 3329.94,-280 h60 r180
  text "G" at 3425,-280.67 h60 r180
  text "G" at 3525,-280.67 h60 r180
  text "Iridium" at 2355,-300.61 h60 r180
  text "PPS" at 4424.33,-640 h60 r90
  text "G" at 4969.33,-920 h60 r90
  text "R" at 4970,-1030 h60 r90
  text "VH" at 4970,-1164.94 h60 r90
  text "G" at 4969.33,-1565 h60 r90
  text "L" at 4970,-1650 h60 r90
  text "VH" at 4970,-1794.94 h60 r90
  text "D" at 3140,-2075 h60 r90
  text "C" at 3139.33,-2170 h60 r90
  text "G" at 3134.33,-2270 h60 r90
  text "V" at 3140,-2369.94 h60 r90
  text "G" at 339.33,-2440 h60 r90
  text "OFF" at 460,-2470 h60
  text "ON" at 1010,-2475 h60
  text "+" at 350.36,-2525 h100 r90
  text "Loggerhead Medusa-AI" at 2410,-2707.42 h200
Mechanical 1:
  lines w10: -80,-2605 -80,-65 -80,80 5005,80 5005,-70 ; -80,-2595 -80,-2775 5005,-2775 5005,-2610 5005,-65

## Text inside footprints (layer, text, board x,y; h text height)
C2: Top Overlay "+" at 1215,-2418.5 h19.68 r90
U3: Mechanical 13 "ANTENNA" at 48.86,-1607.17 h50 r90